# Altium PCB Board Assembly.PcbDoc (part 2 of 3)
Units mil, origin at the board's own origin, x right, y up, seen from the top; angles counter-clockwise.
Board outline 3645 x 2655 mil, 2 copper layers (Top Layer, Bottom Layer); 97 components, 111 nets, 464 pads, 100 vias.
Unrouted connection lines stored in the file: 11.
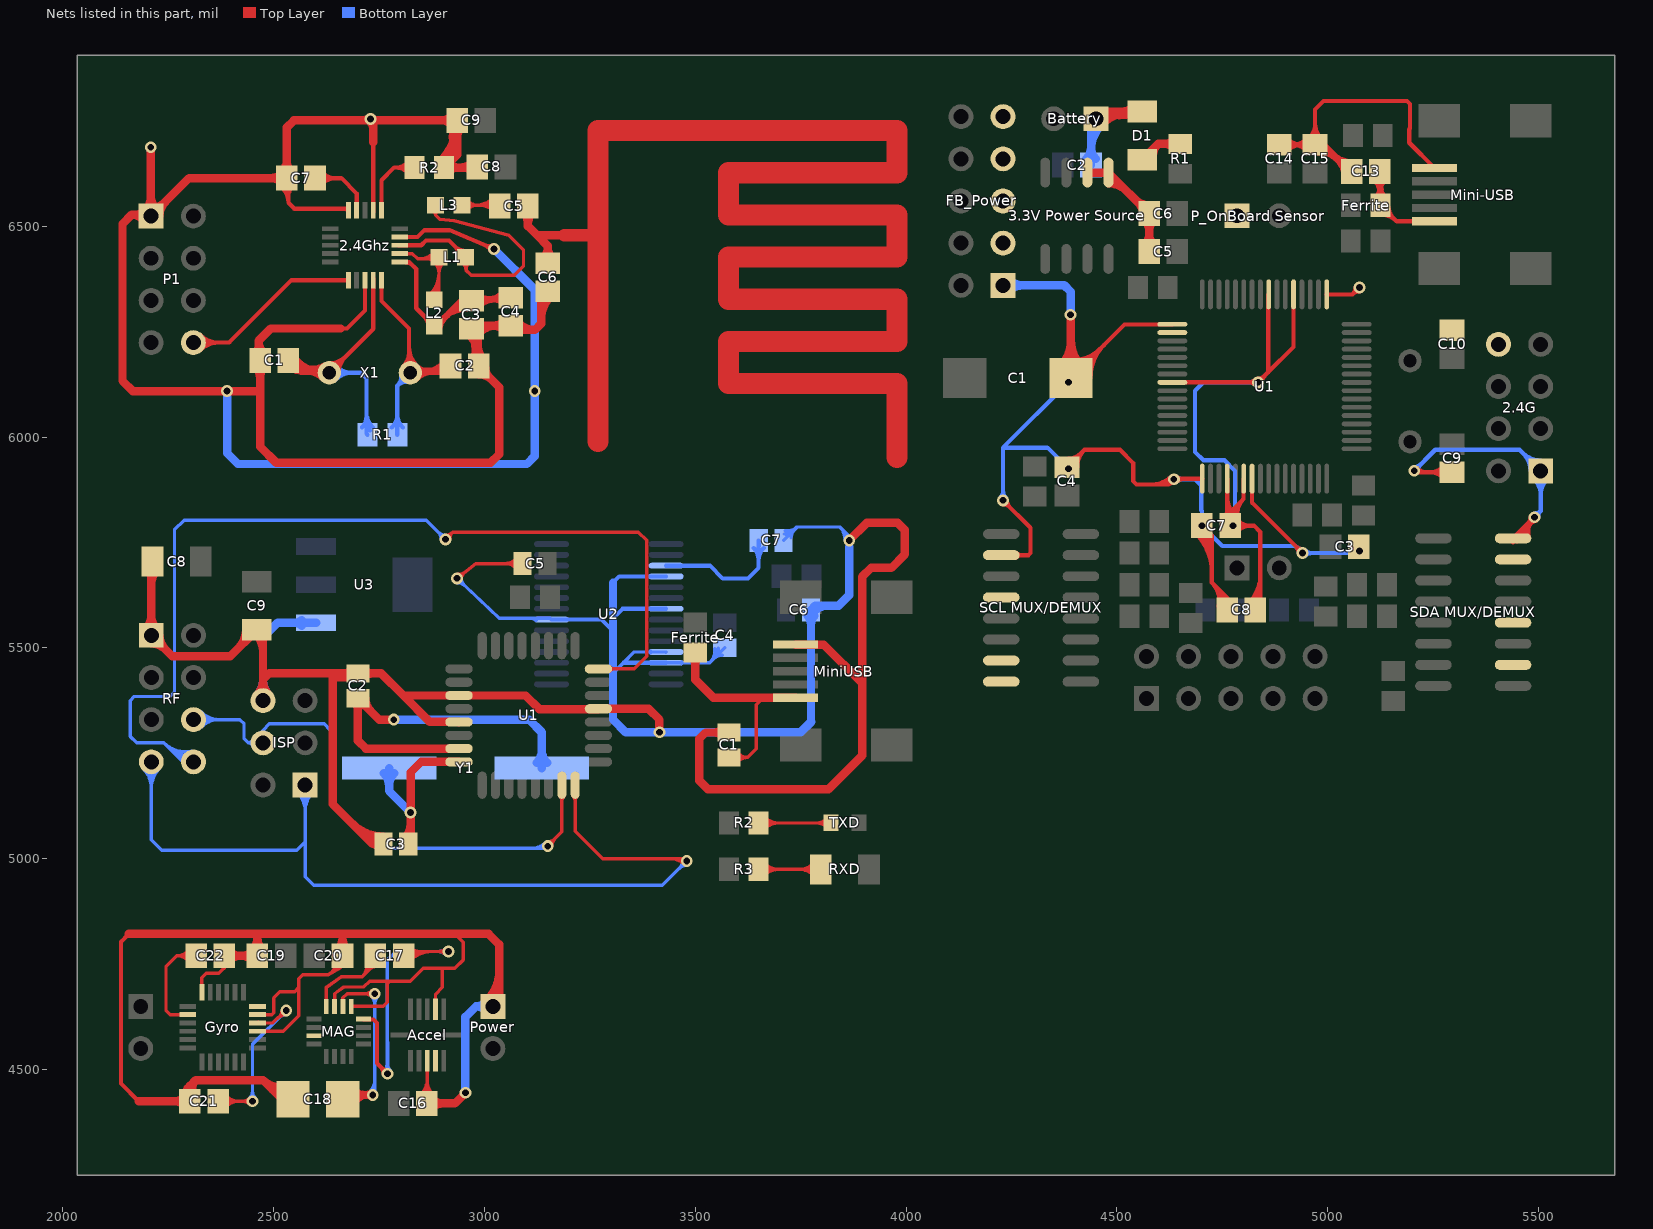
[diagram p2: the nets of this part, all layers, seen from the top]

## Via types
v1: diameter 28, hole 16, Top Layer to Bottom Layer, 96 vias
v2: diameter 59.06, hole 35.43, Top Layer to Bottom Layer, 4 vias

## Nets (pads, with @x,y where several pads share a name; then routed paths per layer and width w, separated by ;. In a path a pad name is that pad's centre, name@x,y a point inside that pad or via, vN(x,y) a via of type N, cw(c..) or ccw(c..) an arc to the next point about the centre after c; other vN are vias at no path point) (continued)
GND: 2.4G.1 2.4Ghz.8 2.4Ghz.14 2.4Ghz.17 2.4Ghz.20 "3.3V Power Source.1" "3.3V Power Source.2" "P_OnBoard Sensor.1" "SCL MUX/DEMUX.2" "SCL MUX/DEMUX.4" "SCL MUX/DEMUX.7" "SCL MUX/DEMUX.8" "SDA MUX/DEMUX.2" "SDA MUX/DEMUX.4" "SDA MUX/DEMUX.7" "SDA MUX/DEMUX.8" Accel.3 Accel.8 Battery.1 C1.1@2468.04,6182.13 C1.2@3580,5299.53 C1.2@4390.98,6140 C2.1 C3.1 C4.1 C5.1@3090.47,5700 C5.1@4576.54,6440 C6.1 C7.1@2531.23,6614.11 C7.1@4701.54,5790 C7.2@3709.53,5755 C8.1@2983.11,6640.58 C8.1@4761.54,5590 C8.2@2212.91,5705 C9.1@2935.25,6751.12 C9.1@5295,5916.54 C9.2@2460,5542.91 C10.1 C13.2 C14.2 C15.2 C16.1 C18.2 C19.1 C20.1 C21.1 C22.1 D1.2 FB_Power.1 FB_Power.3 FB_Power.5 FB_Power.7 FB_Power.9 Gyro.9 Gyro.11 Gyro.18 ISP.6 MAG.9 MAG.11 Mini-USB.5 MiniUSB.5 P1.1 Power.1 R2.2@2904.65,6639.11 RF.1 U1.1@4631.5,6267.64 U1.3@2939.65,5387.24 U1.5@2939.65,5324.25 U1.17@4702.36,5901.5 U1.21@3270.35,5355.75 U1.23@4820.47,5901.5 U1.49 U2.7 U2.18 U2.21 U2.25 U2.26 U3.1 | length 29433.5
  Top Layer w8: C8.2@2200,5705 C8.2@2214.88,5705 ; Gyro.18@2330,4683.54 2330,4718.37 2340,4728.37 2370,4728.37 2381.63,4740 2383.37,4740 ; C22.1@2379.36,4744.87 cw(c2378.42,4740) 2383.37,4740 ; C22.1@2383.46,4770 2383.37,4769.91 2383.37,4740 ; C22.1@2387.39,4744.83 ccw(c2388.29,4740) 2383.37,4740 ; Gyro.9@2461.89,4591.02 2522.88,4591.02 2559.6,4627.74 2559.6,4629.6 2560,4630 2560,4695 ; Gyro.11@2461.89,4630.39 2495.39,4630.39 2500,4635 2500,4670 2515,4685 2550,4685 2560,4695 ; 2629.23,4725.02 ccw(c2609.55,4760.54) C20.1@2649.94,4764.68 ; 2639.83,4730.89 ccw(c2622.66,4761.88) C20.1@2657.9,4765.49 ; MAG.11@2644.68,4649.25 2644.68,4680 2666.64,4696.1 2714.24,4696.1 2727.74,4709.6 2775,4709.6 ; 2650.43,4736.76 ccw(c2635.77,4763.23) C20.1@2665.86,4766.31 ; C20.1@2659.05,4765.59 C20.1@2663.46,4770 2658.25,4741.1 2629.19,4725 2569.31,4725 2560,4715.69 2560,4695 ; MAG.9@2684.05,4649.25 2685.2,4650.4 2760.4,4650.4 2769.6,4659.6 2769.6,4704.2 2775,4709.6 ; MAG.9@2685.26,4648.04 cw(c2690.95,4642.36) 2690.95,4650.4 ; C16.1@2848.2,4439.2 ccw(c2809.15,4478.25) 2864.37,4478.25 ; C16.1@2853.85,4433.55 ccw(c2828.47,4458.93) 2864.37,4458.93 ; 2864.37,4454.56 ccw(c2894.09,4454.56) C16.1@2873.07,4433.55 ; 2864.37,4473.88 ccw(c2913.4,4473.88) C16.1@2878.73,4439.2 ; Accel.3@2864.37,4521.22 2864.37,4420.91 C16.1@2863.46,4420 C16.1@2883.46,4400 ; Accel.8@2884.05,4643.27 2884.05,4679.06 2900,4695 2900,4740 ; 2930,4821.9 2950,4801.9 2950,4760 2930,4740 2900,4740 ; v1(2935,5665) 2980,5700 C5.1@3090.47,5700 ; v1@2936.24,5674.92 ccw(c2939.23,5698.88) 2954.06,5679.82 ccw(c2968.88,5660.77) v1@2944.92,5663.76 ; C5.1@3077.99,5687.52 ccw(c3047.85,5657.38) 3047.85,5700 ccw(c3047.85,5742.62) C5.1@3077.99,5712.48 ; C5.1@3083.65,5693.17 ccw(c3067.17,5676.69) 3067.17,5700 ccw(c3067.17,5723.31) C5.1@3083.65,5706.83 ; 2775,4709.6 2824.6,4709.6 2855,4740 2900,4740
  Top Layer w10: 2155,4820 2138.1,4803.1 2138.1,4466.9 2180,4425 ; C7.1@2517.55,6594.78 cw(c2482.71,6555.57) 2535.16,6555.57 ; C7.1@2524.19,6602.26 cw(c2502.49,6577.83) 2535.16,6577.83 ; 2535.16,6569.97 cw(c2571.43,6569.97) C7.1@2545.79,6595.61 ; C7.1@2535.16,6614.11 2535.16,6555.71 2549.07,6541.8 2673.08,6541.8 2.4Ghz.20@2677.35,6537.54 ; 2659.82,6257.64 2674.32,6257.64 2716.72,6300.04 2.4Ghz.8@2716.72,6372.18 2.4Ghz.8@2716.72,6376.12 ; 2665.34,6541.8 cw(c2665.34,6525.53) 2.4Ghz.20@2676.85,6537.04 ; 2.4Ghz.17@2736.4,6533.6 2.4Ghz.17@2736.4,6537.54 2736.4,6699.11 ; 2.4Ghz.14@2795.46,6474.55 2.4Ghz.14@2799.39,6474.55 2841.57,6474.55 2857.8,6490.77 2916.82,6490.77 2916.88,6490.7 v1(3022.86,6445.81) ; C8.1@2981.64,6639.11 C8.1@2983.11,6640.58 ; C2.1@2984.22,6169.11 C2.1@2984.69,6169.58 ; v1@3014.52,6442.43 ccw(c2994.38,6434.28) 3002.85,6454.29 ccw(c3011.33,6474.29) v1@3019.48,6454.15 ; C4.1@3059.69,6264.58 C4.1@3070.16,6254.11 ; 4225.51,5720 4290,5720 4295,5725 4295,5785 v1(4230,5850) ; v1@4230,5841 cw(c4230,5819.27) 4245.36,5834.64 cw(c4260.73,5850) v1@4239,5850 ; 4261.82,5715.18 cw(c4273.45,5703.56) 4273.45,5720 cw(c4273.45,5736.44) 4261.82,5724.82 ; v1(4385,5925) C4.1@4381.54,5928.46 4423.07,5970 ; C1.2@4385,6139 ccw(c4385,6151.03) C1.2@4393.51,6142.52 ; C4.1@4385.45,5924.11 ccw(c4373.44,5948.11) C4.1@4399.41,5941.32 ; C4.1@4385.47,5949.06 ccw(c4385.47,5989.26) 4413.9,5960.83 ; C1.2@4390.98,6140 4517.88,6266.9 4630.76,6266.9 U1.1@4631.5,6267.64 ; C4.1@4394,5925 cw(c4432.46,5925) C4.1@4405.26,5952.19 ; C1.2@4394,6130 cw(c4425.42,6130) C1.2@4403.2,6152.22 ; C1.2@4394.92,6172.24 ccw(c4394.92,6240.58) 4443.24,6192.26 ; C1.2@4394.92,6182.24 ccw(c4394.92,6274.73) 4460.32,6209.33 ; C4.1@4396.06,5928.53 cw(c4430.48,5928.74) C4.1@4406.14,5953.07 ; C4.1@4406.06,5928.59 cw(c4464.13,5928.94) 4423.07,5970 ; C1.2@4417.17,6140 cw(c4480.37,6140) C1.2@4435.68,6184.69 ; C1.2@4427.17,6140 cw(c4514.51,6140) 4452.75,6201.76 ; C1.2@4437.17,6140 cw(c4548.66,6140) 4469.82,6218.84 ; 4584.06,5887.9 ccw(c4584.06,5950.94) v1@4628.64,5906.36 ; 4608.2,5887.9 ccw(c4608.2,5926.8) v1@4635.71,5899.29 ; v1@4626.15,5898.36 cw(c4614.58,5896.22) 4622.9,5887.9 ; v1@4633.36,5891.15 ccw(c4631.22,5879.58) 4622.9,5887.9 ; v1@4641.36,5893.64 cw(c4660.34,5874.66) 4660.34,5901.5 ; v1@4641.36,5906.36 ccw(c4653.12,5918.12) 4653.12,5901.5 ; C7.1@4686.98,5771.5 cw(c4595.18,5679.7) 4725,5679.7 ; C7.1@4694.05,5778.57 cw(c4619.32,5703.85) 4725,5703.85 ; C7.1@4699.21,5781.31 cw(c4695.83,5768.69) C7.1@4707.14,5775.22 ; C7.1@4699.93,5781.14 cw(c4693.39,5745.12) C7.1@4725.1,5763.43 ; C7.1@4700.66,5790.49 ccw(c4719.41,5780.08) C7.1@4702.03,5767.53 ; C7.1@4701.12,5785.65 cw(c4643.46,5727.99) 4725,5727.99 ; C7.1@4701.54,5781 cw(c4701.54,5759.27) 4716.9,5774.64 cw(c4732.26,5790) C7.1@4710.54,5790 ; v1(4701.54,5790) 4725,5766.54 4725,5655 ; C7.1@4701.71,5790.98 cw(c4698.44,5772.96) C7.1@4714.31,5782.12 ; U1.17@4702.36,5901.5 4636.5,5901.5 v1(4635,5900) 4622.9,5887.9 ; C7.1@4708.19,5792.72 cw(c4667.6,5752.13) 4725,5752.13 ; C7.1@4709.41,5785.63 ccw(c4734.6,5771.65) 4711.25,5754.78 ; C7.1@4710.23,5787.67 ccw(c4739.59,5779.8) C7.1@4713.27,5764.61 ; 4737.87,5642.13 cw(c4702.79,5607.06) C8.1@4751.2,5596.25 ; C8.1@4741.44,5598.43 ccw(c4681.76,5611.76) 4725,5655 ; 4750.73,5629.27 cw(c4723.82,5602.36) C8.1@4760.96,5594.07 ; C8.1@4761.54,5590 4761.54,5618.46 4725,5655 ; U1.23@4820.47,5901.5 4820.47,5844.53 v1(4940,5725) ; C14.2@4885,6693.46 C15.2@4970,6693.46 ; C14.2@4903.5,6678.9 cw(c4938.65,6643.75) 4938.65,6693.46 cw(c4938.65,6743.17) C14.2@4903.5,6708.02 ; v1@4931,5725 ccw(c4909.27,5725) 4924.64,5740.36 ccw(c4940,5755.73) v1@4940,5734 ; C15.2@4951.5,6678.9 ccw(c4916.35,6643.75) 4916.35,6693.46 ccw(c4916.35,6743.17) C15.2@4951.5,6708.02 ; C15.2@4955.44,6708.02 ccw(c4920.29,6743.17) 4970,6743.17 ccw(c5019.71,6743.17) C15.2@4984.56,6708.02 ; C15.2@4973.94,6672.87 cw(c4973.94,6576.97) C13.2@5041.75,6644.78 ; C15.2@4973.94,6682.87 cw(c4973.94,6611.11) 5024.68,6661.86 ; C15.2@4973.94,6692.87 cw(c4973.94,6645.26) 5007.61,6678.93 ; U1.49@4997.64,6338.5 5058.5,6338.5 v1(5075,6355) ; 5011.97,6663.15 cw(c4983.24,6616.55) C13.2@5036.5,6629.19 ; 5014.66,6671.87 ccw(c5056.54,6713.74) C13.2@5056.54,6654.53 ; 5018.02,6659.41 ccw(c5041.47,6697.44) C13.2@5051.78,6653.97 ; 5024.17,6662.37 cw(c4995.74,6633.94) C13.2@5035.94,6633.94 ; C13.2@5031.74,6654.8 ccw(c5056.54,6679.6) C13.2@5056.54,6644.53 ; C13.2@5032.52,6650.48 cw(c5016.46,6624.43) C13.2@5046.23,6631.49 ; C13.2@5056.54,6630 4993.07,6693.46 C15.2@4970,6693.46 ; v1@5066,6355 cw(c5044.27,6355) 5059.64,6339.64 cw(c5075,6324.27) v1@5075,6346 ; v1(5205,5920) 5208.46,5916.54 C9.1@5295,5916.54 ; v1@5211.36,5926.36 ccw(c5235.09,5950.09) 5235.09,5916.54 ; Mini-USB.5@5253.07,6637.99 5193.1,6697.96 5193.1,6730 5195,6731.9 5195,6790 5188.1,6796.9 4990,6796.9 4970,6776.9 C15.2@4970,6693.46 ; C9.1@5276.5,5901.98 ccw(c5241.35,5866.83) 5241.35,5916.54 ccw(c5241.35,5966.25) C9.1@5276.5,5931.1 ; 5439.24,5750.32 cw(c5451.28,5753.99) 5442.38,5762.89 ; 5439.49,5760 v1@5489.49,5810 ; 5448.8,5753.24 cw(c5469.33,5759.49) 5454.16,5774.67 ; 5458.37,5756.15 cw(c5487.38,5765) 5465.93,5786.44 ; 5467.93,5759.07 cw(c5505.43,5770.5) 5477.71,5798.22 ; 5469.28,5783.62 cw(c5502.15,5764.64) 5492.33,5801.31 ccw(c5498.35,5778.86) 5478.22,5790.48 ; 5473.76,5794.27 cw(c5490,5778.04) v1@5490,5801 ; 5475,5795.51 ccw(c5460.51,5810) v1@5481,5810 ; 5476.34,5795.84 cw(c5485.97,5790.28) v1@5488.2,5801.18 ; 5477.5,5761.99 cw(c5523.48,5776.01) v1@5489.49,5810 ; 5479.29,5792.33 ccw(c5461.78,5802.44) v1@5481.31,5807.67 ; v1(5490,5810) v1@5489.49,5810 ; 4423.07,5970 4507.07,5970 4538.54,5938.54 4538.54,5896.1 4546.74,5887.9 4622.9,5887.9
  Top Layer w20: 2156.9,4821.9 2465,4821.9 ; 2170.54,6527.42 ccw(c2170.54,6563.26) 2195.88,6537.92 ccw(c2164.96,6568.84) 2208.69,6568.84 ; 2180,4425 C21.1@2301.54,4425 2301.54,4461.54 ; P1.1@2194.19,6512.23 ccw(c2163.4,6488.62) 2163.4,6527.42 ; RF.1@2196.19,5543.81 ccw(c2162.86,5577.14) 2210,5577.14 ccw(c2257.14,5577.14) RF.1@2223.81,5543.81 ; C8.2@2201.89,5684.13 cw(c2182.31,5664.55) 2210,5664.55 ; 2208.69,6573.67 ccw(c2259.25,6573.67) P1.1@2223.5,6537.92 ; v1(2208.69,6687.57) P1.1@2208.69,6525.11 ; P1.1@2209.69,6543.64 ccw(c2209.69,6590.78) 2243.03,6557.45 ccw(c2276.36,6524.11) P1.1@2229.22,6524.11 ; RF.1@2210,5510.47 cw(c2210,5463.33) 2243.34,5496.66 cw(c2276.67,5530) RF.1@2229.53,5530 ; 2210,5650.48 cw(c2257.59,5650.48) C8.2@2223.94,5684.13 ; C8.2@2214.88,5705 2210,5700.12 RF.1@2210,5530 2260,5480 2397.09,5480 C9.2@2460,5542.91 2475,5527.91 2475,5425 ; C21.1@2290.51,4413.98 ccw(c2263.9,4387.36) 2263.9,4425 ccw(c2263.9,4462.64) C21.1@2290.51,4436.02 ; C21.1@2291.75,4441.07 ccw(c2275.25,4461.53) 2301.54,4461.53 ; C21.1@2298.16,4426.1 cw(c2317.12,4442.07) 2299.59,4459.59 ; C21.1@2311.32,4441.07 cw(c2327.82,4461.53) 2301.54,4461.53 ; C21.1@2313.46,4438.98 cw(c2333.85,4456.15) 2315,4475 ; C22.1@2383.46,4770 C19.1@2461.54,4770 2461.54,4818.44 2465,4821.9 ; C22.1@2394.49,4758.98 cw(c2421.1,4732.36) 2421.1,4770 cw(c2421.1,4807.64) C22.1@2394.49,4781.02 ; 2416.58,5499.5 ccw(c2373.17,5542.91) C9.2@2434.57,5542.91 ; C19.1@2450.51,4758.98 ccw(c2423.9,4732.36) 2423.9,4770 ccw(c2423.9,4807.64) C19.1@2450.51,4781.02 ; C19.1@2450.51,4784.96 ccw(c2423.9,4811.58) 2461.54,4811.58 ccw(c2499.17,4811.58) C19.1@2472.56,4784.96 ; C1.1@2457.01,6167.17 cw(c2430.4,6140.55) 2468.04,6140.55 cw(c2505.67,6140.55) C1.1@2479.06,6167.17 ; C1.1@2457.01,6197.09 ccw(c2439.44,6214.66) 2464.29,6214.66 ; C9.2@2458.82,5531.89 cw(c2419.75,5492.82) 2475,5492.82 ; ISP.6@2461.19,5388.81 ccw(c2427.86,5422.14) 2475,5422.14 ccw(c2522.14,5422.14) ISP.6@2488.81,5388.81 ; ISP.6@2475,5375 2475,5425 ; C9.2@2475,5517.73 cw(c2495.03,5517.73) C9.2@2480.87,5531.89 ; C1.1@2478.26,6197.84 cw(c2504.88,6228.48) 2464.29,6228.48 ; 2497.18,4452.82 ccw(c2527.86,4483.5) C18.2@2542.73,4442.74 ; C7.1@2520.2,6603.09 ccw(c2493.59,6576.47) 2493.59,6614.11 ccw(c2493.59,6651.75) C7.1@2520.2,6625.13 ; C7.1@2520.2,6629.07 ccw(c2493.59,6655.69) 2531.23,6655.69 ccw(c2568.86,6655.69) C7.1@2542.25,6629.07 ; C7.1@2535.16,6614.11 C7.1@2531.23,6614.11 ; C18.2@2535.88,4461.53 cw(c2516,4516) 2475,4475 ; C18.2@2545.94,4430 2520,4430 2475,4475 ; 2642.96,5430 ccw(c2642.96,5490.66) 2685.85,5447.77 cw(c2665.96,5467.66) 2665.96,5439.53 cw(c2665.96,5411.39) C2.1@2685.85,5431.29 ; C20.1@2652.44,4784.96 ccw(c2625.83,4811.58) 2663.46,4811.58 ccw(c2701.1,4811.58) C20.1@2674.49,4784.96 ; 2659.82,6257.64 2493.44,6257.64 2464.29,6228.48 ; C20.1@2663.46,4770 2663.46,4818.44 2660,4821.9 ; 2687.01,5082.99 ccw(c2760.47,5156.45) C3.1@2760.47,5052.56 ; 2713.1,6751.24 ccw(c2713.1,6770.7) v1@2726.86,6756.94 ; C2.1@2714.15,5431.29 cw(c2734.04,5411.39) 2734.04,5439.53 cw(c2734.04,5467.66) C2.1@2714.15,5447.77 ; 2721.16,5048.84 ccw(c2760.47,5088.16) C3.1@2760.47,5032.56 ; v1@2726.86,6751.28 cw(c2703.83,6728.25) 2736.4,6728.25 ; v1@2732.52,6756.94 ccw(c2746.28,6770.7) 2746.28,6751.24 ; 2736.4,6699.11 2736.4,6747.4 v1@2732.56,6751.24 ; C3.1@2751.65,5027.38 ccw(c2735,5012.99) 2735,5035 ; C3.1@2751.65,5042.62 cw(c2735,5057.01) 2735,5035 ; C3.1@2760.47,5035 2735,5035 ; C16.1@2863.46,4420 2930,4420 v1(2955,4445) ; C16.1@2874.49,4408.98 cw(c2901.1,4382.36) 2901.1,4420 cw(c2901.1,4457.64) C16.1@2874.49,4431.02 ; R2.2@2895.02,6652.68 ccw(c2797.9,6749.8) C9.1@2935.25,6749.8 ; 2897.32,6751.24 cw(c2897.32,6713.19) C9.1@2924.22,6740.1 ; 2897.9,6751.24 ccw(c2897.9,6788.47) C9.1@2924.22,6762.14 ; R2.2@2904.65,6656.67 ccw(c2904.65,6699.06) 2934.63,6669.09 ; R2.2@2909.16,6638.54 ccw(c2846.19,6701.51) 2935.25,6701.51 ; R2.2@2914.28,6629.48 cw(c2937.54,6606.22) 2937.54,6639.11 cw(c2937.54,6672) R2.2@2914.28,6648.74 ; R2.2@2918.27,6643.05 cw(c2941.65,6643.05) R2.2@2925.12,6659.58 ; C9.1@2921.74,6739.39 cw(c2891.15,6721.72) 2925.27,6712.58 ; C9.1@2924.22,6736.16 cw(c2897.61,6709.54) 2935.25,6709.54 cw(c2972.88,6709.54) C9.1@2946.27,6736.16 ; 2924.43,6709.42 cw(c2963.01,6699.09) C9.1@2943.04,6733.68 ; U1.5@2939.65,5324.25 2938.9,5325 2870,5325 2807.76,5387.24 ; 2941.92,6639.11 ccw(c2941.92,6681.77) C8.1@2972.08,6651.6 ; 2949.02,6639.11 cw(c2949.02,6606.49) C8.1@2972.08,6629.56 ; C3.1@2962.24,6245.52 cw(c2908.05,6191.33) C2.1@2984.69,6191.33 ; C2.1@2973,6180.52 ccw(c2931.35,6204.57) 2977.81,6217.02 ; C2.1@2975.48,6183.75 ccw(c2953.25,6205.98) 2984.69,6205.98 ; 2981.63,6202.74 ccw(c3007.89,6209.77) C2.1@2994.3,6186.23 ; C8.1@2981.64,6639.11 R2.2@2904.65,6639.11 2935.25,6669.7 C9.1@2935.25,6751.12 2935.13,6751.24 v1@2732.56,6751.24 ; C2.1@2984.22,6169.11 3034.69,6118.64 3034.69,5959.11 3014.69,5939.11 2506.32,5939.11 2468.04,5977.39 2468.04,6108.39 ; C3.1@2984.29,6245.52 cw(c3030.31,6199.5) 3030.31,6264.58 ; C2.1@2984.69,6169.58 2984.69,6264.58 C4.1@3059.69,6264.58 ; 2984.69,6214.75 ccw(c3028.52,6214.75) C2.1@2997.53,6183.75 ; C2.1@2986.5,6149.26 cw(c2986.5,6106.87) 3016.48,6136.85 ; C2.1@3002.1,6164.85 ccw(c3034.98,6164.85) C2.1@3011.73,6141.6 ; Power.1@3006.19,4663.81 ccw(c2936.64,4733.36) 3035,4733.36 ; 3019.08,6264.58 cw(c3019.08,6224.26) C4.1@3047.6,6252.77 ; Power.1@3020,4650 3035,4665 3035,4796.9 3010,4821.9 2930,4821.9 2660,4821.9 ; Power.1@3020.33,4649.67 ccw(c2984.93,4685.07) 3035,4685.07 ; 3022.88,6264.58 ccw(c3022.88,6299.53) C4.1@3047.6,6274.82 ; C4.1@3070.16,6254.11 3119.69,6254.11 ; C4.1@3078.58,6273.64 ccw(c3119.69,6307.12) 3119.69,6254.11 ; 3134.69,6279.72 cw(c3212.22,6279.72) C6.1@3157.4,6334.54 ; C6.1@3134.69,6349.58 3134.69,6269.11 3119.69,6254.11 ; v1(3415,5300) 3415,5330 3389.25,5355.75 U1.21@3270.35,5355.75 3269.61,5355 3130,5355 3097.76,5387.24 U1.3@2939.65,5387.24 2807.76,5387.24 ; C1.2@3565.85,5291.29 ccw(c3545.96,5271.39) 3545.96,5299.53 ccw(c3545.96,5327.66) C1.2@3565.85,5307.77 ; C1.2@3580,5299.53 3524.53,5299.53 3510,5285 3510,5185 3530,5165 3815.93,5165 3895.93,5245 3895.93,5416.63 ; MiniUSB.5@3738.07,5507.99 3804.57,5507.99 3895.93,5416.63 ; v1(3865,5755) 3906.9,5796.9 3980,5796.9 3996.9,5780 3996.9,5721.9 3965,5690 3916.9,5690 3895.93,5669.03 3895.93,5416.63 ; C1.2@4364.65,6166.34 ccw(c4301.07,6229.92) 4390.98,6229.92 ccw(c4480.9,6229.92) C1.2@4417.32,6166.34 ; C1.2@4382.17,6132.83 ccw(c4360.9,6154.1) C1.2@4390.98,6154.1 ; v1(4390,6290) 4390.98,6289.02 C1.2@4390.98,6140 ; 4430,6627.36 4480,6627.36 4480,6626.54 C6.1@4576.54,6530 C5.1@4576.54,6440 ; Battery.1@4449.67,6755.33 cw(c4490.11,6714.89) 4490.11,6772.09 ; Battery.1@4450,6755 4467.09,6772.09 D1.2@4560,6772.09 ; Battery.1@4463.81,6741.19 cw(c4538.39,6666.61) D1.2@4538.39,6772.09 ; 4480,6601.93 cw(c4480,6542.52) 4522.01,6584.53 ; 4480,6621.93 cw(c4480,6610.81) 4487.86,6618.67 ; 4505.91,6763.38 cw(c4518.35,6716.99) D1.2@4542.36,6758.58 ; 4520.11,6767.19 ccw(c4513.06,6793.5) D1.2@4536.66,6779.88 ; D1.2@4539.13,6761.06 ccw(c4512.52,6734.45) 4512.52,6772.09 ccw(c4512.52,6809.73) D1.2@4539.13,6783.11 ; 4543.2,6563.34 ccw(c4576.54,6596.67) C6.1@4576.54,6549.53 ; C6.1@4552.7,6553.83 cw(c4532.81,6533.94) C6.1@4560.94,6533.94 ; C5.1@4565.51,6454.96 ccw(c4538.9,6481.58) 4576.54,6481.58 ccw(c4614.17,6481.58) C5.1@4587.56,6454.96 ; C6.1@4565.51,6515.04 cw(c4538.9,6488.42) 4576.54,6488.42 cw(c4614.17,6488.42) C6.1@4587.56,6515.04 ; 2163.4,6527.42 2141.79,6505.81 2141.79,6133.31 2165.99,6109.11 v1(2389.69,6109.11) 2467.32,6109.11 2468.04,6108.39 ; 2163.4,6527.42 2206.38,6527.42 P1.1@2208.69,6525.11 ; P1.1@2208.69,6525.11 P1.1@2209.69,6524.11 ; P1.1@2208.69,6525.11 2201.4,6517.82 P1.1@2209.69,6524.11 ; P1.1@2209.69,6524.11 2299.69,6614.11 C7.1@2531.23,6614.11 ; 2301.54,4461.54 2315,4475 ; 2315,4475 2475,4475 ; 2464.29,6228.48 2464.29,6185.88 C1.1@2468.04,6182.13 2468.04,6108.39 ; 2465,4821.9 2660,4821.9 ; 2475,5425 2489.53,5439.53 C2.1@2700,5439.53 ; C7.1@2531.23,6614.11 2531.23,6734.4 2548.07,6751.24 v1@2729.69,6751.24 ; C2.1@2700,5439.53 2690.47,5430 2640,5430 2640,5130 2735,5035 ; C2.1@2700,5439.53 2755.47,5439.53 2807.76,5387.24 ; v1@2729.69,6751.24 v1@2732.56,6751.24 ; v1@2729.69,6751.24 v1(2729.69,6754.11) v1@2732.56,6751.24
  Bottom Layer w8: v1(2935,5665) 3035,5570 U2.7@3156.38,5570 ; v1@2935.26,5655 cw(c2935.88,5630.87) 2952.5,5648.37 cw(c2969.13,5665.88) v1@2945,5665.26 ; 3111,5570 cw(c3111,5553.48) U2.7@3122.68,5565.16 ; 3305,5440 3329.84,5464.84 3355.43,5490.43 U2.25@3430.83,5490.43 U2.25@3430.39,5490 ; U2.25@3394.33,5488.39 ccw(c3389.4,5483.46) 3389.4,5490.43 ccw(c3389.4,5497.41) U2.25@3394.33,5492.48 ; U2.26@3430.83,5464.84 3534.37,5464.84 ; U2.26@3467.32,5462.8 cw(c3472.25,5457.87) 3472.25,5464.84 cw(c3472.25,5471.82) U2.26@3467.32,5466.89 ; 3544.04,5474.51 cw(c3564.09,5454.46) C4.1@3564.09,5482.82 ; 3546.35,5476.82 ccw(c3526.37,5496.79) C4.1@3554.49,5499.54 ; C4.1@3546.52,5498.76 cw(c3504.55,5494.66) 3534.37,5464.84 ; C4.1@3570,5500.47 3534.37,5464.84 ; C7.2@3709.53,5755 3741.33,5786.8 ; C7.2@3711.42,5770.37 ccw(c3715.62,5791.37) C7.2@3730.75,5776.23 ; C7.2@3712.99,5778.22 ccw(c3719.14,5808.99) 3741.33,5786.8 ; C7.2@3727.18,5760.91 cw(c3755.54,5760.91) 3735.49,5780.96 ; v1@3855.02,5755.61 ccw(c3814.49,5758.09) 3843.2,5786.8 ; 3855.76,5774.24 cw(c3838.16,5756.64) v1@3863,5755.12 ; v1(3865,5755) 3865,5765 3843.2,5786.8 ; 3741.33,5786.8 3843.2,5786.8
  Bottom Layer w10: U2.7@3159.17,5567.2 3277.8,5567.2 3305,5540 ; 3305,5570 3327.8,5592.8 U2.21@3430.83,5592.8 ; 3305,5655 3319.57,5669.57 U2.18@3430.83,5669.57 ; 3329.84,5464.84 U2.26@3430.83,5464.84 ; v1@4223.64,5856.36 ccw(c4208.27,5871.73) 4230,5871.73 ccw(c4251.73,5871.73) v1@4236.36,5856.36 ; v1(4230,5850) 4230,5975 ; v1@4376,5925 ccw(c4354.27,5925) 4369.64,5940.36 ccw(c4385,5955.73) v1@4385,5934 ; v1@4376,6130 cw(c4354.27,6130) 4369.64,6114.64 cw(c4385,6099.27) v1@4385,6121 ; v1(4385,5925) 4335,5975 4230,5975 ; v1(4385,6130) 4230,5975 ; v1(4635,5900) 4685,5900 4700,5885 4700,5826.54 4701.54,5825 v1(4701.54,5790) 4749.64,5741.9 4923.1,5741.9 v1(4940,5725) 5070,5725 v1(5075,5730) ; v1@4641.36,5893.64 cw(c4656.73,5878.27) 4656.73,5900 cw(c4656.73,5921.73) v1@4641.36,5906.36 ; v1@4695.17,5796.36 ccw(c4679.81,5811.73) 4701.54,5811.73 ccw(c4723.26,5811.73) v1@4707.9,5796.36 ; v1@4701.54,5781 cw(c4701.54,5759.27) 4716.9,5774.64 cw(c4732.26,5790) v1@4710.54,5790 ; v1@4931,5725 ccw(c4909.27,5725) 4924.64,5740.36 ccw(c4940,5755.73) v1@4940,5734 ; v1@4946.36,5718.64 cw(c4961.73,5703.27) 4961.73,5725 cw(c4961.73,5746.73) v1@4946.36,5731.36 ; 5041.2,5725 ccw(c5041.2,5763.8) v1@5068.64,5736.36 ; v1(5205,5920) 5255,5970 5455,5970 2.4G.1@5505,5920 5505,5825 ; v1@5205,5929 ccw(c5205,5950.73) 5220.36,5935.36 ccw(c5235.73,5920) v1@5214,5920 ; 2.4G.1@5480.47,5920 ccw(c5421.26,5920) 5463.13,5961.87 ccw(c5505,6003.74) 2.4G.1@5505,5944.53 ; 2.4G.1@5487.66,5902.66 cw(c5445.79,5860.79) 5505,5860.79 cw(c5564.21,5860.79) 2.4G.1@5522.34,5902.66 ; v1(5490,5810) 5505,5825 ; v1@5490.15,5819 ccw(c5490.51,5839.49) 5505,5825 ; 2.4G.1@5490.47,5920 ccw(c5455.4,5920) 5480.2,5944.8 ccw(c5505,5969.6) 2.4G.1@5505,5934.53 ; 2.4G.1@5494.73,5909.73 cw(c5469.93,5884.93) 5505,5884.93 cw(c5540.07,5884.93) 2.4G.1@5515.27,5909.73 ; v1@5499,5810.15 cw(c5519.49,5810.51) 5505,5825
  Bottom Layer w20: v1(2389.69,6109.11) 2389.69,5961.9 2415.38,5936.21 3100.54,5936.21 3119.3,5954.97 v1(3119.3,6109.25) 3119.3,6349.37 v1(3022.86,6445.81) ; ISP.6@2461.19,5388.81 ccw(c2427.86,5422.14) 2475,5422.14 ccw(c2522.14,5422.14) ISP.6@2488.81,5388.81 ; ISP.6@2470,5380 ISP.6@2475,5375 2475,5525 2510,5560 2600.28,5560 U3.1@2600.83,5559.45 ; 2548.56,5560 cw(c2548.56,5534.74) U3.1@2566.42,5552.6 ; 2551.22,5560 ccw(c2551.22,5581.5) U3.1@2566.42,5566.3 ; v1(2955,4445) 2955,4625 2980,4650 ; Power.1@3004.6,4637.99 ccw(c2980,4618.8) 2980,4650 ; Power.1@3004.6,4662.01 cw(c2980,4681.2) 2980,4650 ; Power.1@3020,4650 2980,4650 ; 3305,5655 3305,5570 3305,5540 3305,5440 3305,5330 3335,5300 v1(3415,5300) 3750,5300 3775,5325 3774.53,5325.47 C6.1@3774.53,5590 3784.53,5600 3840,5600 3865,5625 3865,5740 ; C6.1@3766.29,5575.85 cw(c3746.39,5555.96) 3774.53,5555.96 cw(c3802.66,5555.96) C6.1@3782.77,5575.85 ; C6.1@3782.77,5587.67 cw(c3812.55,5557.89) 3812.55,5600 ; FB_Power.1@4230,6360 4375,6360 4390,6345 v1(4390,6290) ; FB_Power.1@4243.81,6346.19 cw(c4277.14,6312.86) 4277.14,6360 cw(c4277.14,6407.14) FB_Power.1@4243.81,6373.81 ; C2.1@4427.44,6659.96 ccw(c4400.83,6686.58) 4438.46,6686.58 ccw(c4476.1,6686.58) C2.1@4449.49,6659.96 ; C2.1@4438.46,6645 4438.46,6743.46 Battery.1@4450,6755 ; 4438.46,6680.01 cw(c4524.99,6680.01) Battery.1@4463.81,6741.19
IRQ: 2.4G.8 2.4Ghz.6 P1.8 RF.8 U1.24@3270.35,5450.24 | length 3226.6
  Top Layer w8: v1(2907.5,5757.5) 2924.8,5774.8 3365.2,5774.8 3385,5755 3385,5480 3355.24,5450.24 U1.24@3270.35,5450.24 ; v1@2907.5,5767.5 ccw(c2907.5,5791.64) 2924.57,5774.57 ccw(c2941.64,5757.5) v1@2917.5,5757.5 ; U1.24@3296.84,5445.41 cw(c3308.49,5433.76) 3308.49,5450.24 cw(c3308.49,5466.72) U1.24@3296.84,5455.06
  Top Layer w10: P1.8@2309.69,6224.11 2394.69,6224.11 2542.76,6372.18 2.4Ghz.6@2677.35,6372.18 ; P1.8@2319.96,6213.84 cw(c2344.76,6189.04) 2344.76,6224.11 cw(c2344.76,6259.18) P1.8@2319.96,6234.38 ; P1.8@2327.03,6206.77 cw(c2368.9,6164.9) 2368.9,6224.11 cw(c2368.9,6283.32) P1.8@2327.03,6241.45
  Bottom Layer w8: 2250.65,5264.35 ccw(c2294.79,5308.49) RF.8@2306.67,5247.21 ; 2261.3,5253.7 ccw(c2298.25,5290.66) RF.8@2308.19,5239.35 ; 2271.94,5243.06 ccw(c2301.7,5272.82) RF.8@2309.71,5231.5 ; RF.8@2305.14,5255.06 cw(c2291.33,5326.33) 2240,5275 ; RF.8@2310,5230 2285,5230 2240,5275 ; v1@2897.5,5757.5 ccw(c2873.36,5757.5) 2890.43,5774.57 ccw(c2907.5,5791.64) v1@2907.5,5767.5 ; v1(2907.5,5757.5) 2862.1,5802.9 2287.9,5802.9 2265,5780 2265,5395 2255,5385 2170,5385 2160,5375 2160,5290 2175,5275 2240,5275
JTAG_TCK: U1.2@4631.5,6247.95
MISO: ISP.1 RF.7 U1.16@3215.24,5174.65 | length 2567.1
  Top Layer w8: U1.16@3210.41,5148.16 cw(c3198.76,5136.51) 3215.24,5136.51 cw(c3231.72,5136.51) U1.16@3220.06,5148.16 ; U1.16@3215.24,5174.65 3215.24,5065 3280.24,5000 3475,5000 v1(3480,4995) ; 3443.79,5000 cw(c3443.79,4958.79) v1@3472.93,4987.93 ; 3463.1,5000 cw(c3463.1,4978.1) v1@3478.59,4993.59
  Bottom Layer w8: RF.7@2191.95,5211.95 cw(c2148.37,5168.37) 2210,5168.37 cw(c2271.63,5168.37) RF.7@2228.05,5211.95 ; RF.7@2197.61,5217.61 cw(c2167.68,5187.68) 2210,5187.68 cw(c2252.32,5187.68) RF.7@2222.39,5217.61 ; RF.7@2210,5230 2210,5045 2235,5020 2555,5020 2575,5040 ; ISP.1@2556.95,5156.95 cw(c2513.37,5113.37) 2575,5113.37 cw(c2636.63,5113.37) ISP.1@2593.05,5156.95 ; ISP.1@2562.61,5162.61 cw(c2532.68,5132.68) 2575,5132.68 cw(c2617.32,5132.68) ISP.1@2587.39,5162.61 ; ISP.1@2575,5175 2575,5040 ; v1@3470,4995 cw(c3445.86,4995) 3462.93,4977.93 cw(c3480,4960.86) v1@3480,4985 ; v1(3480,4995) 3422.1,4937.1 2595,4937.1 2575,4957.1 2575,5040
MOSI: ISP.4 RF.6 U1.15@3183.74,5174.65 | length 1620.6
  Top Layer w8: v1(3150,5030) 3183.74,5063.74 U1.15@3183.74,5174.65 ; v1@3150,5040 ccw(c3150,5064.14) 3167.07,5047.07 ccw(c3184.14,5030) v1@3160,5030 ; U1.15@3178.91,5148.16 cw(c3167.26,5136.51) 3183.74,5136.51 cw(c3200.22,5136.51) U1.15@3188.57,5148.16
  Bottom Layer w8: RF.6@2310,5330 2420,5330 2430,5320 2430,5285 2440,5275 ; RF.6@2322.39,5317.61 cw(c2352.32,5287.68) 2352.32,5330 cw(c2352.32,5372.32) RF.6@2322.39,5342.39 ; RF.6@2328.05,5311.95 cw(c2371.63,5268.37) 2371.63,5330 cw(c2371.63,5391.63) RF.6@2328.05,5348.05 ; ISP.4@2450.69,5267.2 ccw(c2440,5263.77) 2440,5275 ; ISP.4@2450.69,5282.8 cw(c2440,5286.23) 2440,5275 ; ISP.4@2470.92,5300.2 ccw(c2470.14,5305) 2475,5305 ; ISP.4@2479.08,5300.2 cw(c2479.86,5305) 2475,5305 ; 3113.79,5025 ccw(c3113.79,5066.21) v1@3142.93,5037.07 ; 3133.1,5025 ccw(c3133.1,5046.9) v1@3148.59,5031.41 ; v1(3150,5030) 3145,5025 2745,5025 2635,5135 2635,5305 2620,5320 2490,5320 2475,5305 ; 2440,5275 ISP.4@2475,5275 2475,5305
"Net2.4Ghz Chip_9": 2.4Ghz.9 C1.2@2534.96,6182.13 R1.1@2722.61,6005.61 X1.1 | length 1649.9
  Top Layer w10: C1.2@2527.68,6172.24 ccw(c2569.01,6206) 2569.01,6152.63 ; C1.2@2534.96,6182.13 2564.46,6152.63 ; C1.2@2535.42,6178.57 ccw(c2590.09,6223.22) 2590.09,6152.63 ; C1.2@2540.97,6158.5 cw(c2547.83,6136) 2564.46,6152.63 ; C1.2@2543.17,6184.89 ccw(c2611.17,6240.44) X1.1@2611.17,6152.63 ; C1.2@2550.91,6191.22 ccw(c2632.25,6257.65) X1.1@2632.26,6152.63 ; C1.2@2555.5,6176.7 ccw(c2586.3,6174.46) 2564.46,6152.63 ; 2585.12,6158.16 ccw(c2591.84,6189.81) X1.1@2615.66,6167.9 ; 2588.42,6157.46 cw(c2580.21,6118.82) X1.1@2613.34,6140.34 ; 2602.28,6154.52 ccw(c2606.85,6176.01) X1.1@2623.01,6161.13 ; X1.1@2612.71,6141.37 ccw(c2565.71,6114.31) 2579.74,6166.7 ccw(c2593.78,6219.08) X1.1@2620.95,6172.15 ; X1.1@2616.31,6136.68 ccw(c2577.79,6098.17) 2577.79,6152.63 ccw(c2577.79,6207.09) X1.1@2616.31,6168.58 ; X1.1@2621.37,6146.36 ccw(c2595.21,6131.3) 2603.02,6160.46 ccw(c2610.83,6189.62) X1.1@2625.96,6163.5 ; X1.1@2623.38,6143.75 ccw(c2601.94,6122.31) 2601.94,6152.63 ccw(c2601.94,6182.95) X1.1@2623.38,6161.51 ; X1.1@2632.26,6165.19 ccw(c2632.26,6195.51) 2653.7,6174.07 ccw(c2675.14,6152.63) X1.1@2644.82,6152.63 ; X1.1@2632.26,6175.19 ccw(c2632.26,6229.65) 2670.77,6191.14 ccw(c2709.28,6152.63) X1.1@2654.82,6152.63 ; 2.4Ghz.9@2736.4,6376.12 2.4Ghz.9@2736.4,6372.18 2736.4,6256.77 X1.1@2632.26,6152.63 ; 2564.46,6152.63 X1.1@2632.26,6152.63
  Bottom Layer w10: X1.1@2632.26,6152.63 2706.49,6152.63 2720.14,6138.98 2720.14,6008.08 R1.1@2722.61,6005.61 ; X1.1@2641.14,6143.75 cw(c2662.58,6122.31) 2662.58,6152.63 cw(c2662.58,6182.95) X1.1@2641.14,6161.51 ; X1.1@2648.21,6136.68 cw(c2686.72,6098.17) 2686.72,6152.63 cw(c2686.72,6207.09) X1.1@2648.21,6168.58 ; R1.1@2709.44,6022.71 ccw(c2683.61,6048.55) 2720.14,6048.55 ; 2720.14,6036.32 ccw(c2749.38,6036.32) R1.1@2728.7,6015.64 ; 2720.14,6060.46 ccw(c2773.52,6060.46) R1.1@2735.77,6022.71
"Net2.4Ghz Chip_10": 2.4Ghz.10 C2.2@2919.58,6168.79 R1.2@2793.47,6005.61 X1.2 | length 1150.1
  Top Layer w10: 2.4Ghz.10@2756.09,6376.12 2.4Ghz.10@2756.09,6372.18 2756.09,6322.71 2821.28,6257.52 2821.28,6155.74 X1.2@2824.38,6152.63 2903.42,6152.63 C2.2@2919.58,6168.79 ; X1.2@2808.43,6168.58 ccw(c2777.42,6199.59) 2821.28,6199.59 ; 2821.27,6190.45 ccw(c2862.21,6190.45) 2833.26,6161.51 ccw(c2854.7,6182.95) 2854.7,6152.63 ccw(c2854.7,6122.31) X1.2@2833.26,6143.75 ; 2821.27,6214.6 ccw(c2886.35,6214.6) 2840.33,6168.58 ccw(c2878.85,6207.09) 2878.85,6152.63 ccw(c2878.85,6098.17) X1.2@2840.33,6136.68 ; X1.2@2832.84,6161.92 ccw(c2849.55,6180.26) 2855.19,6156.1 ; X1.2@2839.57,6169.31 ccw(c2865.09,6197.32) 2873.71,6160.42 ; X1.2@2840.36,6152.63 ccw(c2840.36,6244.07) C2.2@2905.02,6179.41 ; X1.2@2843.55,6140.73 cw(c2879.27,6118.53) 2869.7,6159.49 ; 2864.5,6152.63 ccw(c2864.5,6219.93) C2.2@2912.09,6172.34 ; 2888.64,6152.63 ccw(c2888.64,6195.79) C2.2@2919.16,6165.27 ; C2.2@2925.16,6169.11 C2.2@2927.68,6166.59
  Bottom Layer w10: R1.2@2780.31,6022.71 ccw(c2748.52,6054.5) 2793.47,6054.5 ccw(c2838.43,6054.5) R1.2@2806.64,6022.71 ; R1.2@2793.47,6005.61 2793.47,6121.72 ; X1.2@2802.14,6148.87 cw(c2771.51,6143.69) 2793.47,6121.72 ; X1.2@2820.62,6130.39 ccw(c2815.44,6099.75) 2793.47,6121.72 ; X1.2@2824.38,6152.63 2793.47,6121.72
"Net2.4Ghz Chip_11": 2.4Ghz.11 C3.2@2969.33,6323.47 C4.2@3062.56,6330.72 L2.1 | length 1076.6
  Top Layer w10: 2.4Ghz.11@2795.46,6415.49 2821.52,6415.49 2838.27,6398.74 2838.27,6305.65 L2.1@2881.27,6262.65 2942.09,6323.47 C3.2@2969.33,6323.47 ; 2.4Ghz.11@2813.37,6414.78 cw(c2813.37,6393.39) 2828.49,6408.52 ; L2.1@2866.59,6262.65 ccw(c2831.13,6262.65) 2856.2,6287.72 ccw(c2881.27,6312.79) 2881.27,6277.34 ccw(c2881.27,6312.79) 2906.34,6287.72 ccw(c2931.41,6262.65) L2.1@2895.96,6262.65 ; L2.1@2884.32,6277.02 ccw(c2889.76,6302.7) 2904.07,6280.69 ; L2.1@2890.46,6271.85 cw(c2965.39,6196.92) C3.2@2965.39,6302.88 ; L2.1@2895.64,6259.61 cw(c2939.32,6250.35) 2914.98,6287.79 ; 2907.53,6288.92 cw(c2965.39,6231.06) C3.2@2965.39,6312.88 ; 2924.61,6305.99 cw(c2965.39,6265.2) C3.2@2965.39,6322.88 ; C3.2@2980.31,6331.38 ccw(c2995.86,6348.84) 3001.73,6326.21 ; C3.2@2980.76,6315.99 cw(c2999.23,6297.51) 2999.23,6323.64 ; C3.2@2984.69,6323.64 3059.69,6323.64 C4.2@3064.69,6318.64 ; C3.2@2986.96,6338.85 ccw(c3010.85,6365.67) 3019.85,6330.9 ; C3.2@2987.83,6308.91 cw(c3023.37,6273.37) 3023.37,6323.64 ; C3.2@2987.83,6338.03 ccw(c3022.58,6372.79) 3022.58,6323.64 ; C3.2@2991.01,6313.03 cw(c3020.64,6295.59) 3012.02,6328.87 ; C3.2@2991.8,6323.64 ccw(c2991.8,6397.54) C4.2@3044.06,6345.28 ; 3015.95,6323.64 ccw(c3015.95,6373.4) C4.2@3051.13,6338.21 ; 3026.02,6323.64 cw(c3026.02,6298.12) C4.2@3044.06,6316.16
"Net2.4Ghz Chip_12": 2.4Ghz.12 L1.1 L2.2 | length 489.8
  Top Layer w8: 2.4Ghz.12@2795.46,6435.18 2829.29,6435.18 2841.45,6423.01 L1.1@2888.5,6423.01 ; 2845.33,6423.01 ccw(c2845.33,6473.68) L1.1@2881.16,6437.85 ; 2863.44,6423.01 cw(c2863.44,6397.95) 2881.16,6415.67 cw(c2854.39,6388.89) 2892.25,6388.89 cw(c2930.12,6388.89) L1.1@2903.34,6415.67 ; 2864.65,6423.01 ccw(c2864.65,6454.37) L1.1@2886.82,6432.19 ; L2.2@2870.18,6336.74 ccw(c2816.89,6390.03) 2892.25,6390.03 ; L2.2@2875.84,6331.08 ccw(c2836.2,6370.72) 2892.25,6370.72 ; L2.2@2881.27,6325.65 2892.25,6336.63 L1.1@2892.25,6426.76 L1.1@2888.5,6423.01 ; L2.2@2881.49,6325.42 ccw(c2855.51,6351.4) 2892.25,6351.4 ; L1.1@2884.92,6419.43 L1.1@2888.5,6423.01
"Net2.4Ghz Chip_13": 2.4Ghz.13 L1.2 L3.1 | length 784.4
  Top Layer w8: L3.1@2878.54,6535.32 cw(c2875.66,6527.54) 2883.96,6527.54 ; L3.1@2883.96,6550.04 2883.96,6527.54 ; L3.1@2889.39,6535.32 ccw(c2892.26,6527.54) 2883.96,6527.54 ; L1.2@2946.77,6413.56 cw(c2935.5,6396.02) 2956.35,6396.02 cw(c2980.35,6396.02) L1.2@2965.17,6414.61 ; L1.2@2948.74,6426.76 2950.15,6426.76 L1.2@2955.25,6426.76 2956.35,6425.66 2956.35,6396.04 2968.46,6383.93 3070.58,6383.93 3092.82,6406.17 3092.82,6443.29 3057.55,6478.56 2928.46,6513.02 2894.46,6517.04 2883.96,6527.54
  Top Layer w10: 2.4Ghz.13@2795.46,6454.86 2850.37,6454.86 2861.57,6466.06 2915.95,6466.06 L1.2@2955.25,6426.76 L1.2@2950.15,6426.76 ; L1.2@2940.56,6426.76 ccw(c2905.11,6426.76) 2930.18,6451.83 ccw(c2955.25,6476.9) L1.2@2955.25,6441.45
"Net2.4Ghz Chip_16": 2.4Ghz.16 R2.1@2833.78,6639.11 | length 242.2
  Top Layer w10: 2.4Ghz.16@2756.09,6533.6 2756.09,6609.17 2786.03,6639.11 R2.1@2839.69,6639.11 ; R2.1@2820.62,6625.94 ccw(c2788.83,6594.15) 2788.83,6639.11 ccw(c2788.83,6684.07) R2.1@2820.62,6652.28
"Net2.4Ghz Chip_19": 2.4Ghz.19 C7.2@2598.15,6614.11 | length 240.1
  Top Layer w10: C7.2@2594.22,6614.11 2660.67,6614.11 2697.03,6577.75 2.4Ghz.19@2697.03,6537.54 2.4Ghz.19@2697.03,6533.6 ; C7.2@2612.71,6599.55 cw(c2647.86,6564.4) 2647.86,6614.11 cw(c2647.86,6663.82) C7.2@2612.71,6628.67
NetAccel_4: Accel.4
NetC1_1: C1.1@3580,5240.47 Ferrite.1@3500,5489.57 MiniUSB.1 | length 647.2
  Top Layer w8: C1.1@3569.53,5230 C1.1@3580,5240.47 3625,5240.47 ; C1.1@3599.15,5228.8 cw(c3625,5206.01) 3625,5240.47 ; C1.1@3599.15,5252.15 ccw(c3625,5274.93) 3625,5240.47 ; 3662.01,5382.01 3645,5365 3645,5260.47 3625,5240.47
  Top Layer w20: Ferrite.1@3490.37,5479.93 cw(c3467.11,5456.68) 3500,5456.68 cw(c3532.89,5456.68) Ferrite.1@3509.63,5479.93 ; Ferrite.1@3500,5489.57 3500,5425 3542.99,5382.01 3662.01,5382.01 MiniUSB.1@3738.07,5382.01
NetC2_2: C2.2@2700,5380.47 U1.7@2939.65,5261.26 Y1.1@3136.1,5215 | length 1098.6
  Top Layer w20: C2.2@2691.76,5372.23 cw(c2671.87,5352.34) 2700,5352.34 cw(c2728.13,5352.34) C2.2@2708.24,5372.23 ; C2.2@2717.56,5380.47 ccw(c2759.95,5380.47) 2729.98,5350.5 ; v1(2785,5330) 2750.47,5330 2725.47,5355 ; U1.7@2939.65,5261.26 2718.74,5261.26 2700,5280 2700,5305 C2.2@2700,5380.47 2725.47,5355 ; 2725.47,5355 cw(c2745.48,5375.01) 2717.45,5378.88 ccw(c2745.48,5375.01) 2725.47,5355
  Bottom Layer w20: v1(2785,5330) 3106.1,5330 3136.1,5300 Y1.1@3136.1,5215 ; Y1.1@3123.69,5227.42 ccw(c3093.71,5257.39) 3136.1,5257.39 ccw(c3178.49,5257.39) Y1.1@3148.52,5227.42
NetC3_2: C3.2@2819.53,5035 U1.8@2939.65,5229.76 Y1.2@2773.9,5215 | length 526.7
  Top Layer w20: C3.2@2811.29,5049.15 ccw(c2778.18,5082.25) 2825,5082.25 ; C3.2@2819.53,5035 2825,5040.47 v1(2825,5110) 2825,5205 2849.76,5229.76 U1.8@2939.65,5229.76
  Bottom Layer w20: Y1.2@2761.48,5202.58 cw(c2731.51,5172.61) 2773.9,5172.61 cw(c2816.29,5172.61) Y1.2@2786.31,5202.58 ; Y1.2@2773.9,5215 2773.9,5161.1 v1(2825,5110)
NetC5_1: C5.1@3103.27,6547.96 C6.2@3150.31,6412.49 | length 5018.3
  Top Layer w10: C6.2@3134.69,6408.64 C6.2@3139.69,6413.64
  Top Layer w20: C5.1@3092.25,6533 cw(c3065.64,6506.38) 3103.27,6506.38 cw(c3140.91,6506.38) C5.1@3114.3,6533 ; C5.1@3103.27,6547.96 3103.27,6500.53 3124.69,6479.11 ; C6.2@3139.29,6423.52 ccw(c3112.67,6450.13) 3150.31,6450.13 ccw(c3187.95,6450.13) C6.2@3161.33,6423.52 ; C6.2@3150.31,6412.49 3150.31,6453.49 3124.69,6479.11 ; 3189.69,6479.11 3124.69,6479.11
  Top Layer w30: 3189.69,6479.11 3239.69,6479.11
  Top Layer w50: 3268.97,5989.41 3268.97,6727.01 3978.64,6727.01 3978.64,6627.01 3578.64,6627.01 3578.64,6527.01 3978.64,6527.01 3978.64,6427.01 3578.64,6427.01 3578.64,6327.01 3978.64,6327.01 3978.64,6227.01 3578.64,6227.01 3578.64,6127.01 3978.64,6127.01 3978.64,5951.21
NetC5_2: C5.2@3036.35,6547.96 L3.2 | length 304.1
  Top Layer w8: L3.2@2946.96,6550.04 3034.27,6550.04 C5.2@3036.35,6547.96 ; L3.2@2958.05,6538.95 cw(c2984.82,6512.17) 2984.82,6550.04 cw(c2984.82,6587.91) L3.2@2958.05,6561.13 ; 2979.74,6550.04 ccw(c2979.74,6608.5) C5.2@3021.08,6567.16 ; 2988.7,6550.04 cw(c2988.7,6504.26) C5.2@3021.08,6536.63 ; 2999.05,6550.04 ccw(c2999.05,6589.19) C5.2@3026.74,6561.51 ; 3008.02,6550.04 cw(c3008.02,6523.57) C5.2@3026.74,6542.29
  Top Layer w10: C5.2@3032.11,6528.91 C5.2@3046.92,6543.72
NetC7_1: C7.1@3650.47,5755 U2.17 | length 383.9
  Bottom Layer w10: U2.17@3430.83,5695.16 3534.84,5695.16 3565,5665 3625,5665 3650,5690 3650,5754.53 C7.1@3650.47,5755 C7.1@3650.47,5741.5 ; C7.1@3638.7,5737.32 cw(c3611.41,5710.03) 3650,5710.03 ; 3650,5707.75 cw(c3691.82,5707.75) C7.1@3662.25,5737.32
NetC7_2: C7.2@4768.46,5790 C8.2@4828.46,5590 U1.8@4631.5,6129.84 U1.20@4761.42,5901.5 U1.22@4800.79,5901.5 U1.53 U1.56 | length 2535.4
  Top Layer w10: U1.8@4631.5,6129.84 v1(4834.84,6129.84) 4858.97,6153.97 ; C7.2@4753.9,5808.5 ccw(c4735.77,5826.63) 4761.42,5826.63 ; C7.2@4761.42,5796.23 ccw(c4781.23,5796.23) C7.2@4767.22,5782.22 ; 4761.42,5820.38 ccw(c4805.38,5820.38) C7.2@4774.29,5789.29 ; 4761.42,5836.52 ccw(c4811.05,5836.52) C7.2@4775.95,5801.43 ; 4761.42,5844.52 ccw(c4829.52,5844.52) 4781.36,5796.36 ccw(c4796.73,5811.73) 4796.73,5790 ccw(c4796.73,5768.27) C7.2@4781.36,5783.64 ; 4761.42,5860.66 ccw(c4835.19,5860.66) C7.2@4783.02,5808.5 ; U1.20@4761.42,5901.5 C7.2@4761.42,5797.05 ; C7.2@4762.61,5813.68 ccw(c4760.29,5821.52) 4768.46,5821.52 ; 4765,5820.4 cw(c4738.71,5805.22) C7.2@4766.7,5793.48 ; C7.2@4769.02,5794.13 cw(c4802.12,5805.62) 4777.34,5830.4 ; C7.2@4769.09,5796.78 cw(c4765.39,5801.02) C7.2@4761.42,5797.05 ; C7.2@4774.32,5813.68 cw(c4776.64,5821.52) 4768.46,5821.52 ; C7.2@4778.47,5797.41 cw(c4818.86,5811.44) 4788.63,5841.68 ; C7.2@4780.48,5797.14 cw(c4799.2,5821.52) 4768.46,5821.52 ; C7.2@4783.02,5775.44 cw(c4818.17,5740.29) 4818.17,5790 cw(c4818.17,5839.71) C7.2@4783.02,5804.56 ; C7.2@4787.92,5800.69 cw(c4835.61,5817.26) 4799.91,5852.96 ; U1.22@4800.79,5901.5 4799.91,5900.62 4799.91,5852.96 ; C8.2@4813.9,5608.5 ccw(c4750.91,5671.5) 4840,5671.5 ; C8.2@4820.98,5601.43 ccw(c4775.05,5647.35) 4840,5647.35 ; C8.2@4828.05,5594.35 ccw(c4799.19,5623.21) 4840,5623.21 ; C8.2@4828.46,5590 4840,5601.54 4840,5775 4825,5790 v1(4775,5790) C7.2@4768.46,5790 ; v1@4828.48,6123.48 ccw(c4813.11,6108.11) 4813.11,6129.84 ccw(c4813.11,6151.57) v1@4828.48,6136.21 ; v1@4834.84,6138.84 ccw(c4834.84,6160.57) 4850.21,6145.21 ccw(c4865.57,6129.84) v1@4843.84,6129.84 ; U1.56@4859.84,6338.5 4858.97,6337.63 4858.97,6153.97 ; U1.53@4918.9,6338.5 4918.9,6213.9 4858.97,6153.97 ; C7.2@4761.42,5797.05 C7.2@4768.46,5790 ; C7.2@4768.46,5790 4768.46,5821.52 ; 4768.46,5821.52 4799.91,5852.96
  Bottom Layer w10: v1@4768.64,5796.36 ccw(c4741.2,5823.8) 4780,5823.8 ; v1(4775,5790) 4780,5795 4780,5920 4755,5945 4705,5945 4685,5965 4685,6110 4705,6130 4734.69,6130 4734.84,6129.84 v1(4834.84,6129.84) ; v1@4828.48,6123.48 ccw(c4813.11,6108.11) 4813.11,6129.84 ccw(c4813.11,6151.57) v1@4828.48,6136.21
NetC13_1: C13.1 Ferrite.1@5125.43,6550 Mini-USB.1 | length 554.2
  Top Layer w10: C13.1@5108.9,6611.5 cw(c5073.75,6576.35) 5123.46,6576.35 cw(c5173.17,6576.35) C13.1@5138.02,6611.5 ; Ferrite.1@5112.27,6567.1 ccw(c5085.23,6594.14) 5123.46,6594.14 ; C13.1@5113.17,6608.23 cw(c5098.22,6582.34) 5127.1,6590.07 ; 5123.46,6579.5 ccw(c5151,6579.5) Ferrite.1@5131.53,6560.03 ; C13.1@5123.46,6603.65 ccw(c5175.14,6603.65) Ferrite.1@5138.6,6567.1 ; C13.1@5123.46,6630 5123.46,6551.97 Ferrite.1@5125.43,6550 5163.43,6512.01 ; Ferrite.1@5125.52,6537.44 cw(c5125.82,6508.06) Ferrite.1@5146.6,6528.84 ; Ferrite.1@5125.62,6527.44 cw(c5126.16,6474.75) 5163.42,6512.01 ; 5127.79,6587.52 cw(c5147.56,6592.81) C13.1@5135.55,6609.39 ; Ferrite.1@5144.06,6546.06 ccw(c5179.51,6546.06) 5154.44,6520.99 ; Mini-USB.1@5206.34,6508.58 ccw(c5198.07,6500.32) 5198.07,6512.01 ccw(c5198.07,6523.7) Mini-USB.1@5206.34,6515.43 ; Mini-USB.1@5253.07,6512.01 5163.43,6512.01
NetC17_1: C17.1 MAG.8 | length 995
  Top Layer w8: C17.1@2808.46,4770 2818.46,4780 v1(2915,4780) ; C17.1@2812.42,4769.98 cw(c2836.6,4745.8) 2836.6,4780 ; C17.1@2818.07,4764.33 cw(c2855.91,4726.49) 2855.91,4780 ; C17.1@2823.73,4758.67 cw(c2875.23,4707.18) 2875.23,4780 ; C17.1@2823.73,4789.2 ccw(c2845.95,4811.42) 2845.95,4780 ; v1@2907.93,4772.93 ccw(c2890.86,4755.86) 2890.86,4780 ccw(c2890.86,4804.14) v1@2907.93,4787.07
  Top Layer w10: MAG.8@2713.58,4619.72 2714.46,4618.85 2736.73,4618.85 2745,4610.57 2745,4515 v1(2770,4490) ; v1@2761,4490 ccw(c2739.27,4490) 2754.64,4505.36 ccw(c2770,4520.73) v1@2770,4499
  Bottom Layer w8: 2770,4565 2770,4760 2790,4780 v1(2915,4780) ; v1@2907.93,4772.93 ccw(c2890.86,4755.86) 2890.86,4780 ccw(c2890.86,4804.14) v1@2907.93,4787.07
  Bottom Layer w10: v1@2763.64,4496.36 ccw(c2748.27,4511.73) 2770,4511.73 ccw(c2791.73,4511.73) v1@2776.36,4496.36 ; v1(2770,4490) 2770,4565
NetC17_2: C17.2 MAG.12 | length 302.6
  Top Layer w8: MAG.12@2625,4649.25 2625,4695 2660,4720 2710,4720 ; 2719.74,4729.74 ccw(c2695.9,4753.59) C17.2@2728.43,4762.48 ; C17.2@2720.71,4760.37 cw(c2680.6,4749.4) 2710,4720 ; C17.2@2736.14,4764.59 cw(c2711.2,4757.77) 2729.48,4739.48 cw(c2741.54,4727.42) C17.2@2741.54,4744.47 ; C17.2@2741.54,4750 2740,4750 2710,4720
NetC18_1: C18.1 MAG.10 | length 897
  Top Layer w8: C18.1@2664.06,4430 2674.06,4440 v1(2735,4440) ; MAG.10@2664.37,4649.25 2664.37,4670.1 2674.27,4680 v1(2740,4680) ; C18.1@2680.9,4424.37 cw(c2707.76,4409.1) 2707.76,4440 ; C18.1@2683.41,4453.29 ccw(c2715.49,4485.38) 2715.49,4440 ; C18.1@2687.85,4420.41 cw(c2721.51,4401.29) v1@2721.51,4440 ; C18.1@2689.07,4458.95 ccw(c2734.81,4504.69) v1@2734.81,4440 ; C18.1@2694.81,4416.46 cw(c2735.26,4393.48) v1@2735.26,4440 ; 2708,4436.38 cw(c2714.16,4413.39) v1@2728.83,4432.13 ; 2711.55,4446.23 ccw(c2717.84,4469.71) v1@2730,4448.66 ; 2711.78,4446.17 cw(c2705.58,4423.01) v1@2726.34,4435 ; 2718.92,4439.31 ccw(c2715.76,4451.11) v1@2726.34,4445 ; v1@2726.29,4444.91 cw(c2705.8,4456.46) 2711.88,4433.74 cw(c2718.05,4410.71) v1@2729.99,4431.34 ; v1@2727.93,4432.93 ccw(c2710.86,4415.86) 2710.86,4440 ccw(c2710.86,4464.14) v1@2727.93,4447.07 ; v1@2732.93,4672.93 ccw(c2715.86,4655.86) 2715.86,4680 ccw(c2715.86,4704.14) v1@2732.93,4687.07
  Bottom Layer w8: v1@2727.93,4447.07 ccw(c2698.79,4476.21) 2740,4476.21 ; v1@2732.93,4672.93 cw(c2715.86,4655.86) 2740,4655.86 cw(c2764.14,4655.86) v1@2747.07,4672.93 ; v1@2733.59,4441.41 ccw(c2718.1,4456.9) 2740,4456.9 ; v1(2735,4440) 2740,4445 v1(2740,4680)
NetC21_2: C21.2 Gyro.10 | length 697.7
  Top Layer w8: C21.2@2368.46,4425 v1(2450,4425) ; C21.2@2378.07,4415.39 cw(c2401.28,4392.19) 2401.28,4425 cw(c2401.28,4457.81) C21.2@2378.07,4434.61 ; C21.2@2383.73,4409.73 cw(c2420.59,4372.88) 2420.59,4425 cw(c2420.59,4477.12) C21.2@2383.73,4440.27 ; v1@2442.93,4417.93 ccw(c2425.86,4400.86) 2425.86,4425 ccw(c2425.86,4449.14) v1@2442.93,4432.07 ; Gyro.10@2463.77,4612.58 Gyro.10@2461.89,4610.71 2498.48,4610.71 2527.77,4640 v1(2530,4640) ; 2509.12,4621.35 cw(c2530,4600.47) v1@2530,4630 ; 2514.51,4626.74 ccw(c2501.24,4640) v1@2520,4640
  Bottom Layer w8: v1@2442.93,4432.07 ccw(c2425.86,4449.14) 2450,4449.14 ccw(c2474.14,4449.14) v1@2457.07,4432.07 ; v1(2450,4425) 2450,4560 v1(2530,4640) ; v1@2520,4640 cw(c2495.86,4640) 2512.93,4622.93 cw(c2530,4605.86) v1@2530,4630
NetC22_2: C22.2 Gyro.20 | length 353.8
  Top Layer w8: Gyro.20@2296.54,4630.39 2254.61,4630.39 2245,4640 2245,4745 2270,4770 ; C22.2@2300.05,4756.06 ccw(c2270,4730.65) 2270,4770 ; C22.2@2300.05,4783.94 cw(c2270,4809.35) 2270,4770 ; C22.2@2306.16,4761.22 ccw(c2287.24,4745.23) 2287.24,4770 ccw(c2287.24,4794.77) C22.2@2306.16,4778.78 ; C22.2@2316.54,4770 2270,4770
NetD1_1: D1.1 R1.2@4650,6695.43 | length 196.1
  Top Layer w20: D1.1@4560,6657.91 4597.52,6695.43 ; D1.1@4585.31,6659.85 cw(c4627.79,6665.16) 4597.52,6695.43 ; R1.2@4636.43,6685.8 ccw(c4613.18,6662.55) 4613.18,6695.43 ccw(c4613.18,6728.32) R1.2@4636.43,6705.07 ; R1.2@4650,6695.43 4597.52,6695.43
NetGyro_12: Gyro.12
NetINT_3: MAG.15
NetR2_2: R2.2@3650.43,5085 TXD.1 | length 341.6
  Top Layer w8: R2.2@3650.43,5085 TXD.1@3821.54,5085 ; R2.2@3658.65,5076.78 cw(c3678.49,5056.94) 3678.49,5085 cw(c3678.49,5113.06) R2.2@3658.65,5093.22 ; R2.2@3664.31,5071.13 cw(c3697.8,5037.63) 3697.8,5085 cw(c3697.8,5132.37) R2.2@3664.31,5098.87 ; TXD.1@3811.84,5075.3 ccw(c3788.42,5051.89) 3788.42,5085 ccw(c3788.42,5118.11) TXD.1@3811.84,5094.7
NetR3_2: R3.2@3650.43,4975 RXD.1 | length 393.5
  Top Layer w8: R3.2@3644.53,4975 RXD.1@3786.1,4975 ; R3.2@3658.65,4966.78 cw(c3678.49,4946.94) 3678.49,4975 cw(c3678.49,5003.06) R3.2@3658.65,4983.22 ; R3.2@3664.31,4961.13 cw(c3697.8,4927.63) 3697.8,4975 cw(c3697.8,5022.37) R3.2@3664.31,4988.87 ; RXD.1@3782.65,4959.73 ccw(c3745.79,4922.88) 3745.79,4975 ccw(c3745.79,5027.12) RXD.1@3782.65,4990.27 ; RXD.1@3788.3,4965.39 ccw(c3765.1,4942.19) 3765.1,4975 ccw(c3765.1,5007.81) RXD.1@3788.3,4984.61